# Altium PCB 2224_BuzzerWireGame.PcbDoc (part 2 of 2)
Units mm, origin at the board's own origin, x right, y up, seen from the top; angles counter-clockwise.
Board outline 125.2 x 82 mm, 2 copper layers (Top Layer, Bottom Layer), stack 1.586 mm thick; 102 components, 84 nets, 371 pads, 115 vias.
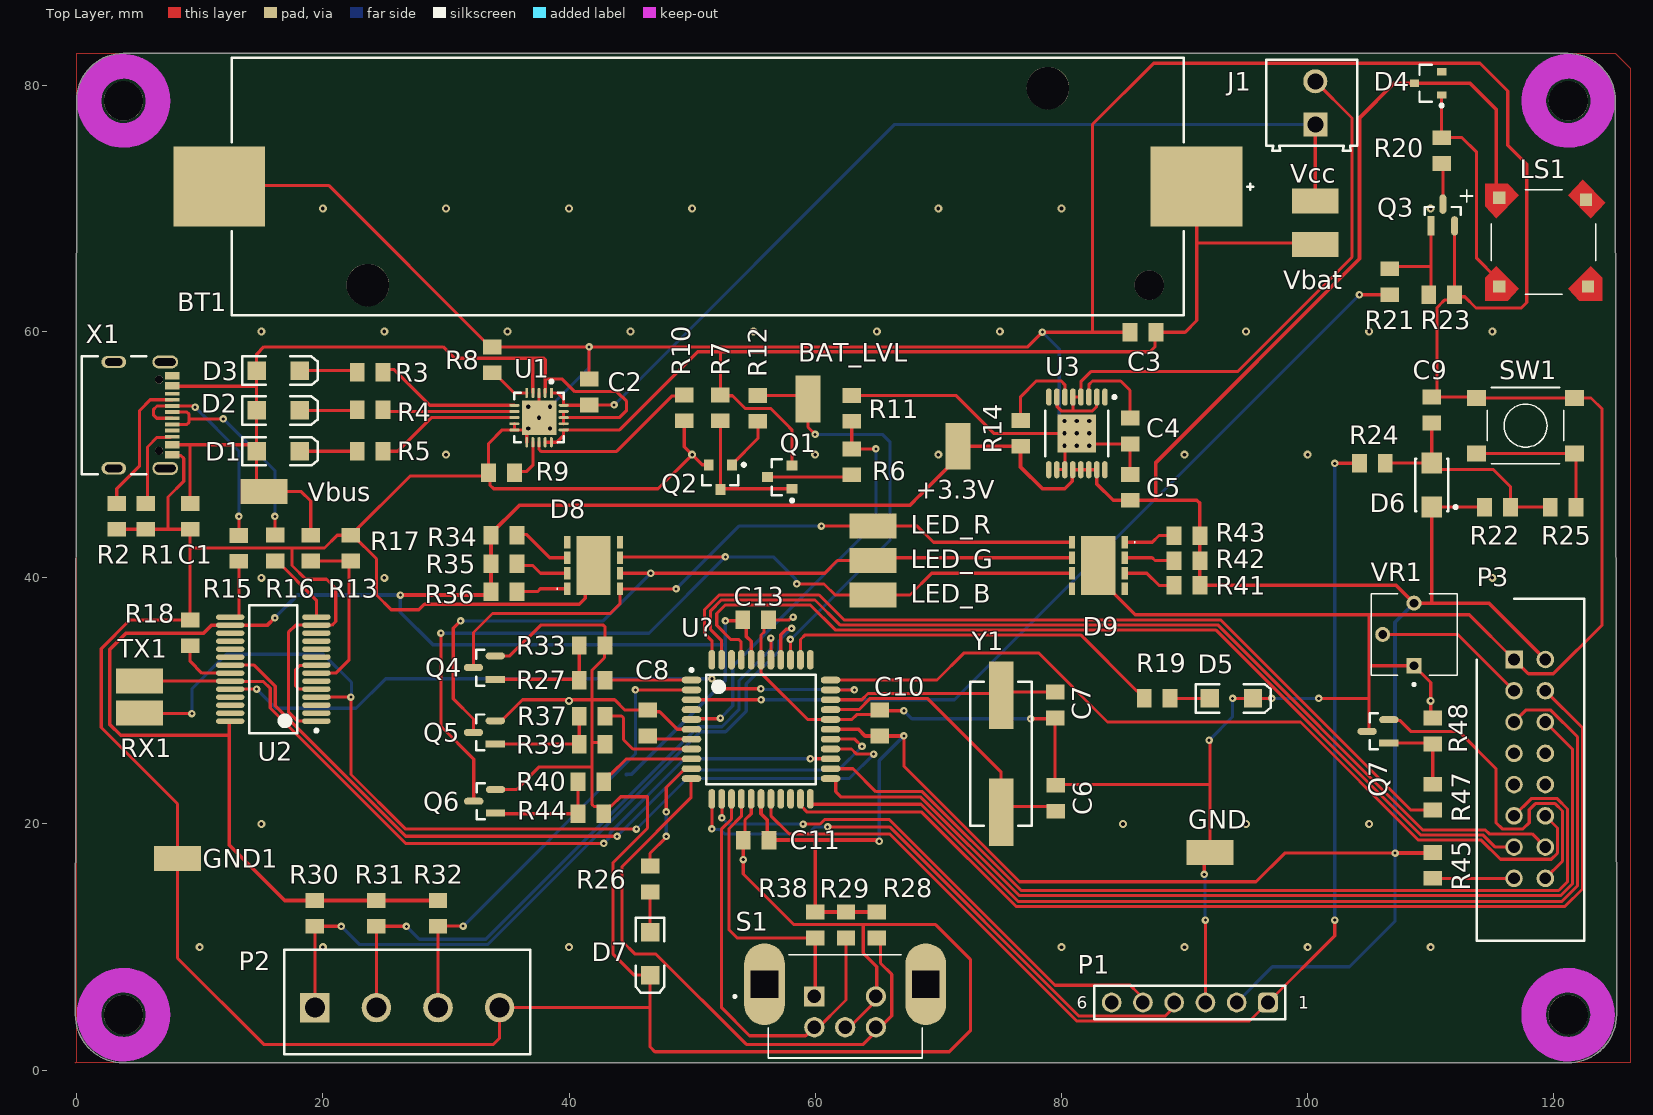
[diagram p0: Top Layer view]

## Via types
v1: diameter 0.61, hole 0.25, Top Layer to Bottom Layer, 62 vias
v2: diameter 0.65, hole 0.3, Top Layer to Bottom Layer, 39 vias
v3: diameter 0.75, hole 0.35, Top Layer to Bottom Layer, 14 vias

## Nets (pads, with @x,y where several pads share a name; then routed paths per layer and width w, separated by ;. In a path a pad name is that pad's centre, name@x,y a point inside that pad or via, vN(x,y) a via of type N, cw(c..) or ccw(c..) an arc to the next point about the centre after c; other vN are vias at no path point) (continued)
NetR8_2: R8.2 U1.5 | length 3.5
  Top Layer w0.254: R8.2 33.906,56.648 35.541,55.013 U1.5
NetR9_2: R9.2 U1.12 | length 3.6
  Top Layer w0.254: R9.2 35.693,48.647 36.577,48.647 37.066,49.137 U1.12
NetR10_2: R10.2 U1.13 | length 14.3
  Top Layer w0.254: U1.13 37.566,50.419 37.715,50.27 43.87,50.27 48.38,54.78 49.291,54.78 R10.2
NetR13_1: R13.1 R17.2 U2.7 | length 14.4
  Top Layer w0.254: R13.1 R17.2@22.134,41.358 ; U2.7 21.049,32.257 22.134,33.342 R17.2@22.134,41.358 ; R17.2 R17.2@22.134,41.358
NetR14_2: R14.2 U3.6 | length 7.2
  Top Layer w0.254: R14.2 76.682,54.716 77.952,55.986 79.984,55.986 80.276,55.694 U3.6
NetR15_2: R15.2 U2.15 | length 5.2
  Top Layer w0.254: U2.15 13.067,36.807 13.182,36.922 R15.2
NetR16_2: R16.2 U2.14 | length 6
  Top Layer w0.254: R16.2 16.282,41.374 19.476,38.18 U2.14
NetR18_2: R18.2 U2.22 | length 4.9
  Top Layer w0.254: R18.2 9.222,33.214 10.179,32.257 U2.22
NetR25_1: R25.1 SW1.2 SW1.4 | length 12.4
  Top Layer w0.254: SW1.2 SW1.4 121.802,49.986 R25.1
NetU2_5: U2.5 U2.8 | length 5
  Top Layer w0.254: U2.5 18.045,30.957 17.791,31.211 17.791,32.548 18.112,32.869 19.438,32.869 U2.8
OSC1: C6.2 U?.30 Y1.1 | length 23.3
  Top Layer w0.254: U?.30@61.3,29.292 63.551,29.292 64.46,30.201 69.099,30.201 75.1,24.2 75.1,21.6 75.278,21.422 C6.2@79.1,21.422
OSC2: C7.2 U?.31 Y1.2 | length 18.6
  Top Layer w0.254: U?.31@61.3,30.092 63.778,30.092 64.293,30.606 74.944,30.606 Y1.2 75.362,30.712 C7.2
PEC12_A: R29.1 S1.A U?.14 | length 34.5
  Top Layer w0.254: U?.14@53.2,21.992 53.2,20.4 52.4,19.6 52.4,5.066 54.666,2.8 59.153,2.8 59.154,2.801 59.223,2.801 59.622,3.2 60,3.2 62.5,5.7 R29.1
PEC12_B: R28.1 S1.B U?.11 | length 48.7
  Top Layer w0.254: U?.11@49.9,23.692 49.896,23.688 49.896,22.123 44.3,16.527 44.3,10.5 45.366,9.434 47.066,9.434 54.403,2.097 63.897,2.097 65,3.2 66.219,4.419 66.219,7.781 65.302,8.698 65.302,10.448 R28.1
PEC12_PB: R38.1 S1.1 U?.15 | length 23.3
  Top Layer w0.254: U?.15@54,21.992 54,20.627 53,19.627 53,11.396 53.646,10.75 R38.1 S1.1@60,5.7
PGEC: P1.5 U?.13 | length 42.6
  Top Layer w0.254: U?.13 52.412,22.03 52.412,20.512 v1(52.424,20.5) ; v1(59.015,19.995) 60.403,19.995 60.759,20.351 66.031,20.351 79.482,6.9 85.59,6.9 86.224,6.266 86.224,6.26 P1.5@86.984,5.5
  Bottom Layer w0.254: v1(52.424,20.5) 52.929,19.995 v1(59.015,19.995)
PGED: P1.4 U?.12 | length 47.6
  Top Layer w0.254: v1(51.6,19.6) U?.12 ; v1(61,19.768) 66.041,19.768 81.409,4.4 88.43,4.4 P1.4@89.53,5.5
  Bottom Layer w0.254: v1(51.6,19.6) 51.661,19.539 52.286,19.539 52.64,19.185 59.434,19.185 60.017,19.768 v1(61,19.768)
PIN_START: P2.1 R30.1 U?.37 | length 61.5
  Top Layer w0.254: P2.1 R30.1 v1(21.5,11.69) ; U?.37@57.2,33.392 57.2,35.375 57.649,35.824 58.013,35.824 v1(58.081,35.892)
  Bottom Layer w0.254: v1(21.5,11.69) 22.99,10.2 33.373,10.2 50.668,27.495 52.726,27.495 54.4,29.169 54.4,31.387 57.083,34.07 57.083,34.907 58.068,35.892 v1(58.081,35.892)
PIN_STOP: P2.2 R31.1 U?.38 | length 52.9
  Top Layer w0.254: P2.2 R31.1 v1(26.79,11.69) ; U?.38@56.4,33.392 v1(56.4,35.1)
  Bottom Layer w0.254: v1(26.79,11.69) 27.84,10.64 33.24,10.64 50.5,27.9 52.424,27.9 53.8,29.276 53.8,31.611 56.476,34.287 56.476,34.541 56.468,34.549 56.468,35.032 v1(56.4,35.1)
PIN_WIRE: P2.3 R32.1 U?.2 | length 38.2
  Top Layer w0.254: P2.3 R32.1 29.368,11.7 v1(31.4,11.7) ; v1(45.4,30.9) 45.404,30.896 49.896,30.896 U?.2@49.9,30.892
  Bottom Layer w0.254: v1(31.4,11.7) 45.4,25.7 v1(45.4,30.9)
PWM_Buzzer: R21.1 U?.3 | length 70.4
  Top Layer w0.254: U?.3@49.9,30.092 v1(55.6,30.092) ; v1(104.208,62.992) 106.648,62.992 R21.1
  Bottom Layer w0.254: v1(55.6,30.092) 71.308,30.092 v1(104.208,62.992)
U1CTS: U2.24 U?.32 | length 54.6
  Top Layer w0.254: U2.24 v1(14.623,30.957) ; v1(51.6,31.8) 52.415,30.985 v1(55.585,30.985) ; U?.32@61.3,30.892 61.301,30.891 v1(63.19,30.89) v1(63.19,30.89)
  Bottom Layer w0.254: v1(14.623,30.957) 16.18,29.4 22.7,29.4 25.1,31.8 v1(51.6,31.8) ; v1(55.585,30.985) 55.63,30.94 63.14,30.94 v1(63.19,30.89)
U1RTS: U2.21 U?.27 | length 63.8
  Top Layer w0.254: U2.21 14.422,32.907 16.132,31.197 16.132,29.595 26.727,19 v1(43.9,19) ; U?.27@61.3,26.892 63.208,26.892 v1(63.8,26.3)
  Bottom Layer w0.254: v1(43.9,19) 49.3,24.4 61.9,24.4 v1(63.8,26.3)
U1RX: RX1.1 U2.4 U?.26 | length 82.1
  Top Layer w0.254: RX1.1 5.163,28.962 v1(9.372,28.962) ; U2.4 v1(22.284,30.307) 22.284,24.016 26.7,19.6 45.468,19.6 v1(45.478,19.59) ; U?.26@61.3,26.092 62.945,26.092 63.361,25.676 v1(64.742,25.676)
  Bottom Layer w0.254: v1(9.372,28.962) 9.372,30.994 12.166,33.788 20.04,33.788 22.326,31.502 22.326,30.348 v1(22.284,30.307) ; v1(45.478,19.59) 49.588,23.7 62.766,23.7 v1(64.742,25.676)
U1TX: TX1.1 U2.23 U?.25 | length 65.6
  Top Layer w0.254: TX1.1 U2.23 12.513,31.569 15.187,31.569 15.727,31.029 15.727,29.427 26.737,18.417 v1(42.821,18.417) ; v1(59.6,25.3) 59.604,25.296 61.296,25.296 U?.25@61.3,25.292
  Bottom Layer w0.254: v1(42.821,18.417) 43.317,18.913 43.317,19.241 49.376,25.3 v1(59.6,25.3)
VBus: C1.2 D1.1 D2.1 D3.1 R13.2 U1.2 U1.4 U1.17 U1.18 U1.19 Vbus.1 X1.A4B9 X1.B4A9 | length 80.9
  Top Layer w0.254: X1.A4B9@7.658,55.56 14.623,55.56 ; X1.B4A9 9.217,50.81 9.222,50.805 ; C1.2 9.222,50.805 ; Vbus.1@14.623,46.996 D1.1@14.623,50.27 ; Vbus.1 18.262,46.996 19.024,46.234 R13.2 ; U1.4 37.058,55.021 37.058,57.829 ; U1.2 38.066,56.14 ; U1.17 U1.18 ; U1.19 U1.18 ; 9.222,50.805 14.102,50.805 D1.1 D2.1 14.623,55.56 ; 14.623,55.56 D3.1 14.623,58.172 15.214,58.763 29.774,58.763 30.708,57.829 37.058,57.829 ; 37.058,57.829 37.949,57.829 38.066,57.712 38.066,56.14 ; 38.066,56.14 39.461,56.14 40.477,55.124 43.882,55.124 44.678,54.328 44.678,53.6 44.091,53.013 U1.18
Vcc: J1.2 U3.2 U3.4 U3.5 U3.7 | length 49.8
  Top Layer w0.254: U3.7 79.663,54.644 79.663,53.881 79.984,53.56 80.926,53.56 ; U3.2 82.849,54.655 82.849,53.885 82.524,53.56 80.926,53.56 ; J1.2 103.606,77.35 103.606,66.046 94.308,56.748 82.391,56.748 81.576,55.933 U3.4 U3.5 80.926,53.56
pads on no net: BT1. D4.2 D8.4 D8.5 D9.4 D9.5 LS1.2 LS1.4 P1.6 P3.7 P3.8 P3.9 P3.10 S1.S1 S1.S2 U2.2 U2.3 U2.6 U2.9 U2.10 U2.11 U2.12 U2.17 U2.18 U2.19 U2.20 U2.25 U2.26 U2.27 U3.1 U3.8 U3.9 U3.16 U?.4 U?.19 U?.20 U?.34 U?.42 X1. X1.A8 X1.B8 X1.S1 X1.S2 X1.S3 X1.S4

## Polygon pours and split planes (outlines as drawn)
GND on Bottom Layer "NONET_L02_P002" (solid, remove dead copper, shelved, pour order 2): -3.797,90.045 -2.797,91.045 135.503,91.045 135.503,-4.655 129.703,-10.455 129.503,-10.255 -9.197,-10.255 -9.197,84.545 -3.697,90.045
GND on Top Layer "NONET_L01_P000" (solid, remove dead copper, shelved, pour order 0): 0,82.6 125,82.6 126.2,81.4 126.2,0.6 -0.1,0.6 0,0.7

## Keep-outs
Keep-Out Layer:
  circle w2: c121.179,78.74 r2.8
  circle w2: c121.158,4.51 r2.8
  circle w2: c3.81,78.74 r2.8
  circle w2: c3.81,4.51 r2.8

## Silkscreen, mask and mechanical layers (free items; w line width, h text height)
Bottom Overlay:
  lines w0.254: 7,19 7,28 37,28 37,19 7,19
  text "2224_BuzzerWireGame" at 36.046,25.608 h1.52
  text "Santiago Valiante" at 36.046,22.962 h1.52
  text "v1.0.0" at 15.849,20.508 h1.52
  text "2023" at 35.938,20.254 h1.52
Board Outline (ES):
  the board outline again, w0.254

## Dimensions
3.81,82.6 to 2.6,48.1 on Mechanical 1
3.81,82.6 to 0.42,58 on Mechanical 1
121.179,82.6 to 122.2,0.6 on Top Dims
0,78.74 to 125,78.74 on Top Dims

## Text inside footprints (layer, text, board x,y; h text height)
P1: Top Overlay "1" at 99.25,5 h1.02; Top Overlay "6" at 81.25,5 h1.02
X1: Top 3D Body "PCB EDGE" at 0.52,47.81 h0.41 r270